# EAGLE board bp_pic_programmer_v4 (EAGLE 5.07)
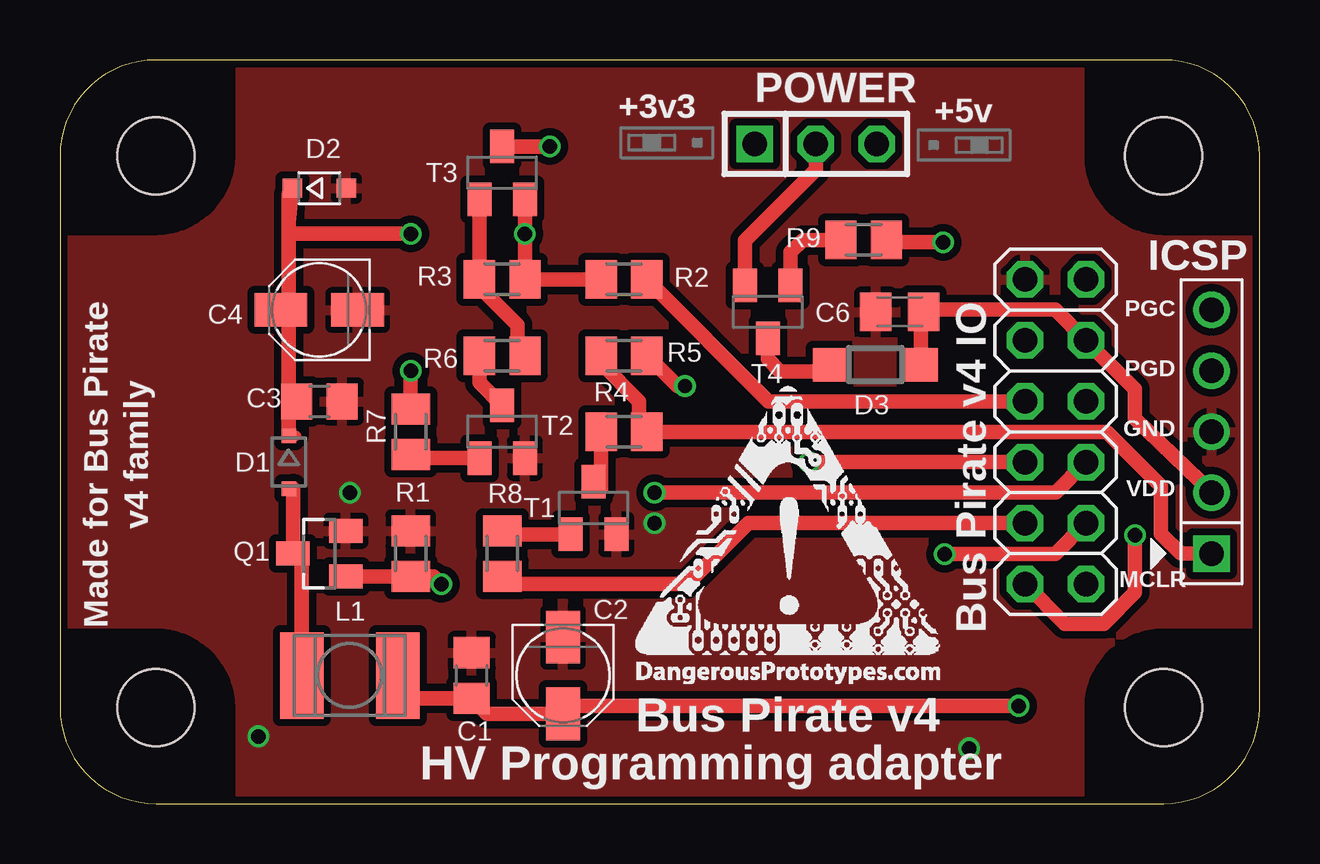
[diagram p0: board, top side]
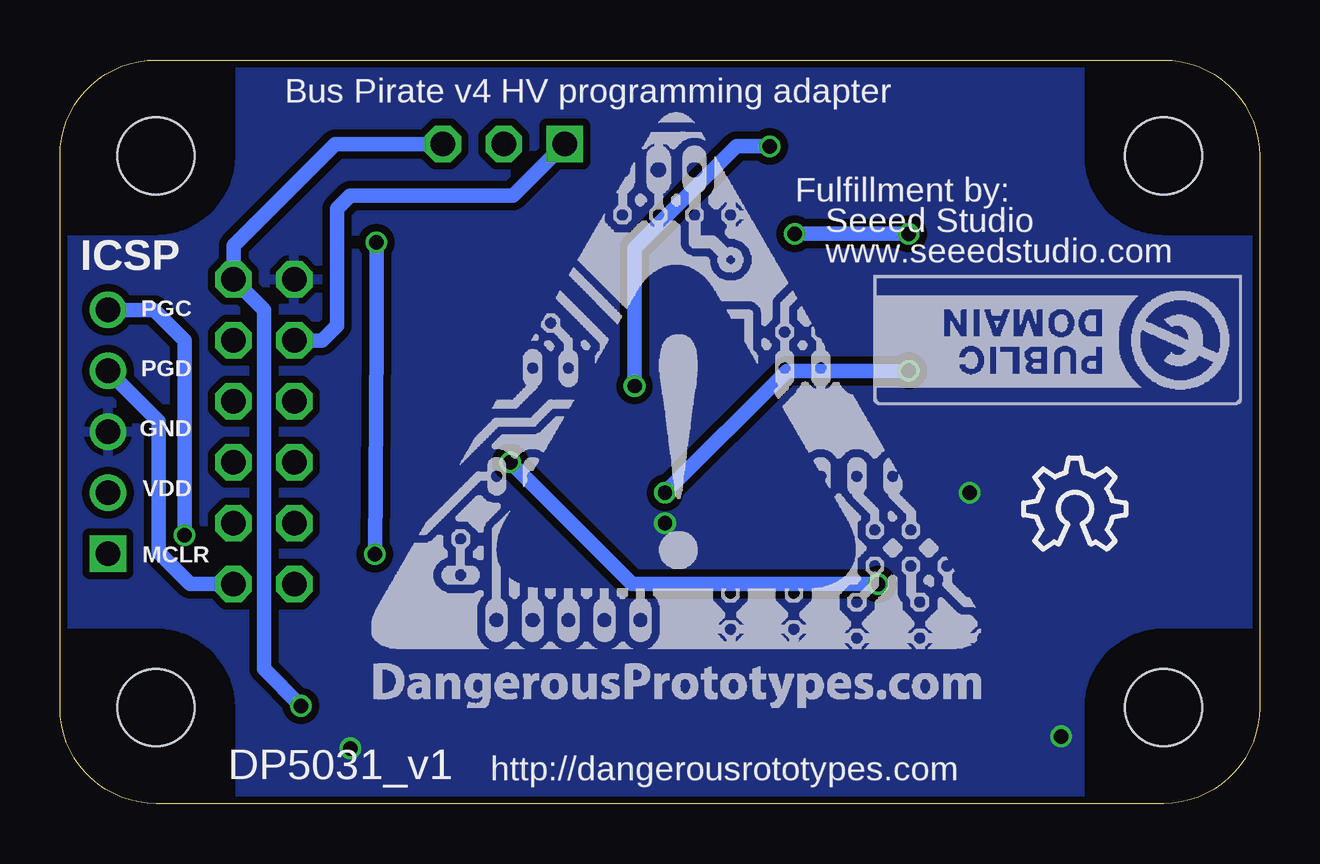
[diagram p1: board, bottom side, seen from below]

Size 50 x 31 mm. Coordinates in mm from the lower left corner, seen from the top.
Copper layers (1*16): Top 0.035mm / dielectric 1.5mm / Bottom 0.035mm
Design rules "Fusion_eagle_rule_v1.1": minimum track width 6mil, minimum drill 12mil, track to track 6mil, track to pad 6mil, pad to pad 6mil, via to via 6mil, smd to smd 0mil, copper to edge 10mil, drill to drill 10mil, minimum pad ring 10mil, minimum via ring 6mil, stop-mask expansion 2mil, vias tented up to drill 100mil, thermal gap 10mil

## Footprints (pad centres in the part's own frame; a part is rotated, then mirrored left to right if it is on the bottom)
C805 = smd 1.3 x 1.5: 1 -0.95,0; 2 0.95,0
CASE_B = smd 2.2 x 1.4: + 1.6,0; - -1.6,0
C0805K = smd 1.3 x 1.6: 1 -1,0; 2 1,0
DO323 = smd 0.6 x 0.6: A 1.1,0; C -1.1,0
SOD-323F = smd 0.8 x 0.8: A 1.125,0; C -1.125,0
SOD123 = smd 1.4 x 1.4: A 1.9,0; C -1.9,0
HEADER_PRG_1X05_ICSP_B = drill 1.016 square: 1 -5.08,0 | drill 1.016 round: 2 -2.54,0; 3 0,0; 4 2.54,0; 5 5.08,0
2X06 = drill 1.016 octagon: 1 -6.35,-1.27; 2 -6.35,1.27; 3 -3.81,-1.27; 4 -3.81,1.27; 5 -1.27,-1.27; 6 -1.27,1.27; 7 1.27,-1.27; 8 1.27,1.27; 9 3.81,-1.27; 10 3.81,1.27; 11 6.35,-1.27; 12 6.35,1.27
L4532P = smd 1.8 x 3.6: 1 -2,0; 2 2,0
DP5031_V1 = hole 3.2: 4,4; 46,4; 46,27; 4,27
1X03 = drill 1.016 square: 1 -2.54,0 | drill 1.016 octagon: 2 0,0; 3 2.54,0
SOT23 = smd 1 x 1.4: 1 -0.95,-1.1; 2 0.95,-1.1; 3 0,1.1
M0805 = smd 1.3 x 1.6: 1 -0.95,0; 2 0.95,0
SOT23-BEC = smd 1 x 1.4: B -0.95,-1.1; C 0,1.1; E 0.95,-1.1

## Placement (x,y rotation side)
C1  0.1uF  [C805]  17.16,5.34 90 top
C2  [CASE_B]  20.97,5.34 270 top
C3  0.1uF  [C805]  10.81,16.77 0 top
C4  [CASE_B]  10.81,20.58 180 top
C6  0.1uF/50V  [C0805K]  35,20.5 180 top
D1  Schottky  [DO323]  9.54,14.23 270 top
D2  13V  [SOD-323F]  10.81,25.66 0 top
D3  1N5819, 20V, 1A+  [SOD123]  33.98,18.3 180 top
ICSP1  HEADER_PRG_PIC_ICSPB  [HEADER_PRG_1X05_ICSP_B]  48,15.5 90 top
JP2  PINSHRD-PTH-2X06  [2X06]  41.5,15.5 90 top
L1  680uH/0.12A  [L4532P]  12.08,5.34 0 top
PCB1  PCB_DP_RECTANGLE-31X50  [DP5031_V1]  0,0 0 top
POWER  [1X03]  31.5,27.5 0 top
Q1  Vth < 3.3V  [SOT23]  10.81,10.42 90 top
R1  1M  [M0805]  14.62,10.42 270 top
R2  20K  [M0805]  23.51,21.85 180 top
R3  100K  [M0805]  18.43,21.85 0 top
R4  100R  [M0805]  23.51,15.5 0 top
R5  10K  [M0805]  23.51,18.68 0 top
R6  10K  [M0805]  18.43,18.68 0 top
R7  10K  [M0805]  14.62,15.5 270 top
R8  10K  [M0805]  18.43,10.42 90 top
R9  10K  [M0805]  33.5,23.5 180 top
T1  NPN, 200mA+, 30+hfe  [SOT23-BEC]  22.24,12.32 0 top
T2  NPN, 200mA+, 30+hfe  [SOT23-BEC]  18.43,15.5 0 top
T3  PNP, 200mA+, 30hfe  [SOT23-BEC]  18.43,26.3 0 top
T4  PNP, 1A+, 40+ hef  [SOT23-BEC]  29.5,20.5 180 top
U$1  [LOGO_CC-0]  0.75,22 180 bottom
U$2  [DP_LOGO_ART_0.5X0.5]  24,5 0 top
U$3  [DP_LOGO_ART_1X1]  37,4 0 bottom
U$4  [OSHW_8X150_NOTEXT]  9.82,10.6 0 bottom
U$5  [JUMP3_DESC_LEFT]  25.3,27.55 0 top
U$6  [JUMP3_DESC_RIGHT]  37.68,27.45 0 top

## Library data of the parts
C1-C4 D1 D2 ICSP1 Q1 T1-T4 U$5 U$6 = dp_devices
C6 L1 R1-R9 = rcl
D3 = diode
JP2 = pinhead
PCB1 = PCBStandards
POWER = pinhead-2
U$1-U$3 = DP
U$4 = ohw-logo

## Nets
ADC: JP2.8 R2.1
AUX2: JP2.7
GND: C1.2 C2.- C3.2 C4.- C6.2 D2.A ICSP1.3 JP2.12 Q1.2 R1.1 T1.E T2.E
MCLR: JP2.4 R8.1
MISO: JP2.3 R9.1
N$1: R9.2 T4.B
N$2: D1.A L1.1 Q1.3
N$3: R4.1 T1.C
N$4: R5.2 T3.C
N$5: R6.1 T2.C
N$6: R3.1 R6.2 T3.B
N$7: R8.2 T1.B
N$8: R7.2 T2.B
N$10: D3.A T4.C
PGC: ICSP1.5 JP2.2
PGD: ICSP1.4 JP2.1
PWM: JP2.6 Q1.1 R1.2
SWV33: JP2.10 POWER.1
SWV50: C1.1 C2.+ JP2.11 L1.2 POWER.3
V_BOOST: C3.1 C4.+ D1.C D2.C R2.2 R3.2 T3.E
VDD_SWITCH: POWER.2 T4.E
VPP: ICSP1.1 R4.2 R5.1
VPPEN: JP2.5 R7.1
VTARGET: C6.1 D3.C ICSP1.2 JP2.9

## Tracks (layer width: path | path; a pad name or v marks a point on that pad's centre or on a via)
ADC
  Top 0.61: 24.78,21.85 R2.1 29.54,16.77 JP2.8
GND  (via drill 0.6)
  other vias: 8.27,2.8 12.08,12.96 37.89,2.3 24.78,11.69
  pour Top (isolate 0.305): -0.36,-0.47 0,30.97 49.66,30.97 50.16,-0.47
  pour Bottom (isolate 0.305): -0.36,-0.47 0,30.97 49.66,30.97 50.16,-0.47
MCLR
  Top 0.61: R8.1 18.75,9.15 26.15,9.15 28.69,11.69 JP2.4
MISO  (via drill 0.6)
  Top 0.61: JP2.3 41.48,10.4 v36.87,10.4 | v36.81,23.4 34.55,23.4 R9.1
  Bottom 0.61: v36.87,10.4 36.8,19.37 v36.8,23.39 v36.81,23.4
N$1
  Top 0.61: T4.B 30.45,22.99 30.96,23.5 R9.2
N$2
  Top 0.406: 9.71,13.13 D1.A | 10.08,10.42 Q1.3
  Top 0.61: Q1.3 9.71,13.13 | L1.1 10.08,10.42
N$3
  Top 0.61: T1.C 22.56,13.11 R4.1
N$4  (via drill 0.6)
  Top 0.61: v26.05,17.41 25.73,17.41 R5.2 | T3.C v20.41,27.39 v20.42,27.4
  Bottom 0.61: v26.05,17.41 26.05,23.16 21.81,27.4 v20.42,27.4
N$5
  Top 0.61: T2.C 17.48,17.55 R6.1
N$6
  Top 0.406: R6.2 19.07,18.99 | 17.48,21.53 R3.1
  Top 0.61: R3.1 T3.B | 19.07,18.99 19.07,19.95 17.48,21.53
N$7
  Top 0.61: T1.B 18.57,11.22 R8.2
N$8
  Top 0.406: R7.2 14.77,14.4
  Top 0.61: 14.77,14.4 T2.B
N$10
  Top 0.61: T4.C 29.5,18.53 30.01,18.02 31.81,18.02 D3.A
PGC  (via drill 0.6)
  Top 0.61: JP2.2 41.88,7.5 43.5,7.5 44.81,8.81 v44.81,11.19
  Bottom 0.61: ICSP1.5 46.08,20.58 44.81,19.31 v44.81,11.19
PGD
  Bottom 0.61: JP2.1 44.57,9.15 45.88,10.46 45.88,15.92 ICSP1.4
PWM  (via drill 0.6)
  Top 0.61: Q1.1 R1.2 15.57,9.47 v15.89,9.15 | v31.23,14.23 JP2.6
  Bottom 0.61: v15.89,9.15 26.15,9.15 v31.23,14.23
SWV33
  Bottom 0.61: JP2.10 39.07,19.31 38.45,19.93 38.45,24.8 37.91,25.34 31.12,25.34 POWER.1
SWV50  (via drill 0.6)
  Top 0.406: 15.03,4.39 L1.2
  Top 0.61: 15.03,4.39 C1.1 17.81,3.74 C2.+ 21.3,4.07 v39.96,4.07
  Bottom 0.61: v39.96,4.07 41.5,5.61 41.5,20.58 JP2.11 42.77,23.27 38.54,27.5 POWER.3
V_BOOST  (via drill 0.6)
  Top 0.406: 9.54,20.58 C4.+ | 9.54,25.39 D2.C | C3.1 9.54,16.77 | D1.C 9.86,15.33
  Top 0.61: 9.54,24.25 9.54,25.39 | 9.54,16.77 9.54,20.58 9.54,23.75 | T3.E v19.38,23.75 R3.2 R2.2 22.24,22.17 | C3.1 9.54,16.45 D1.C | 9.54,24.25 D2.C | 9.54,23.75 9.54,24.25 | 9.54,23.75 v14.62,23.75
  Bottom 0.61: v14.62,23.75 v19.38,23.75
VDD_SWITCH
  Top 0.61: POWER.2 31.5,26.42 28.55,23.47 T4.E
VPP
  Top 0.406: 24.14,15.81 R4.2 | R5.1 22.56,18.36
  Top 0.61: 24.14,15.81 24.14,16.77 22.56,18.36 | R4.2 43.64,15.5 45.89,13.25 45.89,11.25 46.72,10.42 ICSP1.1
VPPEN  (via drill 0.6)
  Top 0.61: JP2.5 41.5,12.96 v24.78,12.96 | R7.1 v14.62,18.04
  Bottom 0.61: v24.78,12.96 19.7,18.04 v14.62,18.04
VTARGET
  Top 0.61: ICSP1.2 44.8,16.05 44.8,17.28 JP2.9 41.48,20.6 36.03,20.6 35.93,20.5 C6.1 35.88,20.39 D3.C

## Text on the board
bPlace: Bus Pirate v4 HV programming adapter | Fulfillment by: | Seeed Studio | www.seeedstudio.com | http://dangerousrototypes.com
tNames: +3v3 | +5v | ICSP | PGC | PGD | GND | VDD | v4 family | MCLR | Made for Bus Pirate | Bus Pirate v4 IO | Bus Pirate v4 | HV Programming adapter
bNames: ICSP | PGC | PGD | GND | VDD | MCLR